# Altium PCB FEE_PCB.PcbDoc (part 1 of 2)
Units mm, origin at the board's own origin, x right, y up, seen from the top; angles counter-clockwise.
Board outline 152.4 x 101.6 mm, 2 copper layers (Top Layer, Bottom Layer); 166 components, 108 nets, 486 pads, 10 vias.
Unrouted connection lines stored in the file: 130.
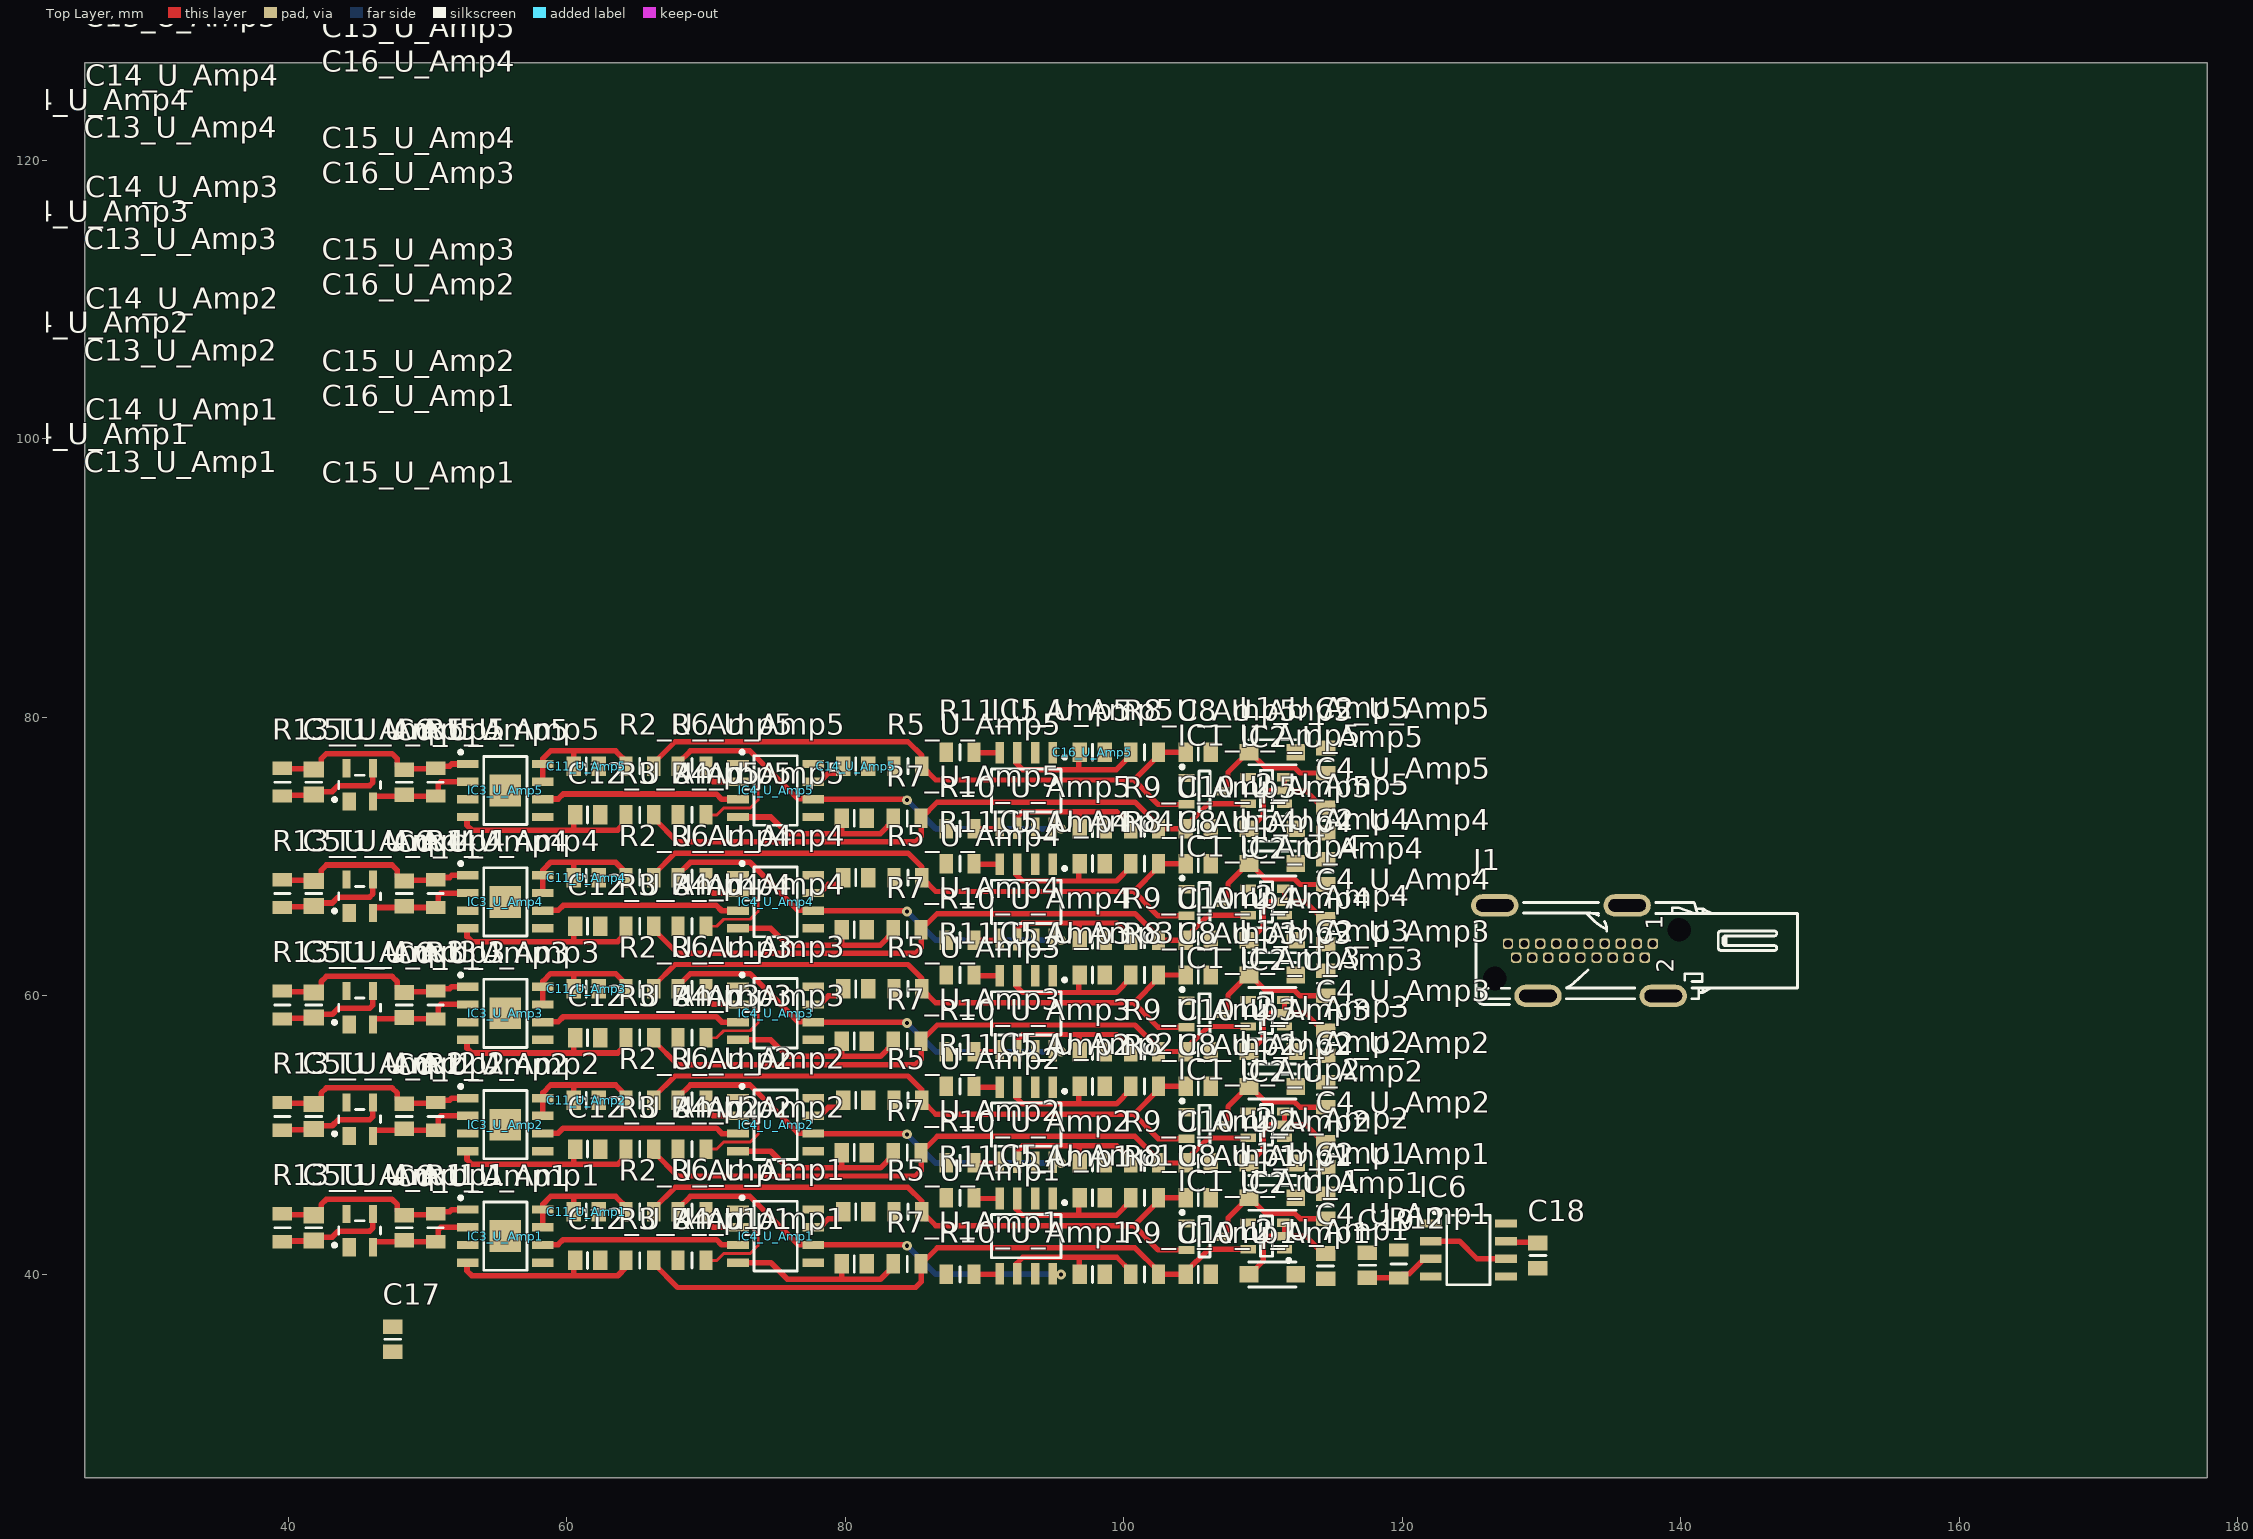
[diagram p0: Top Layer view]
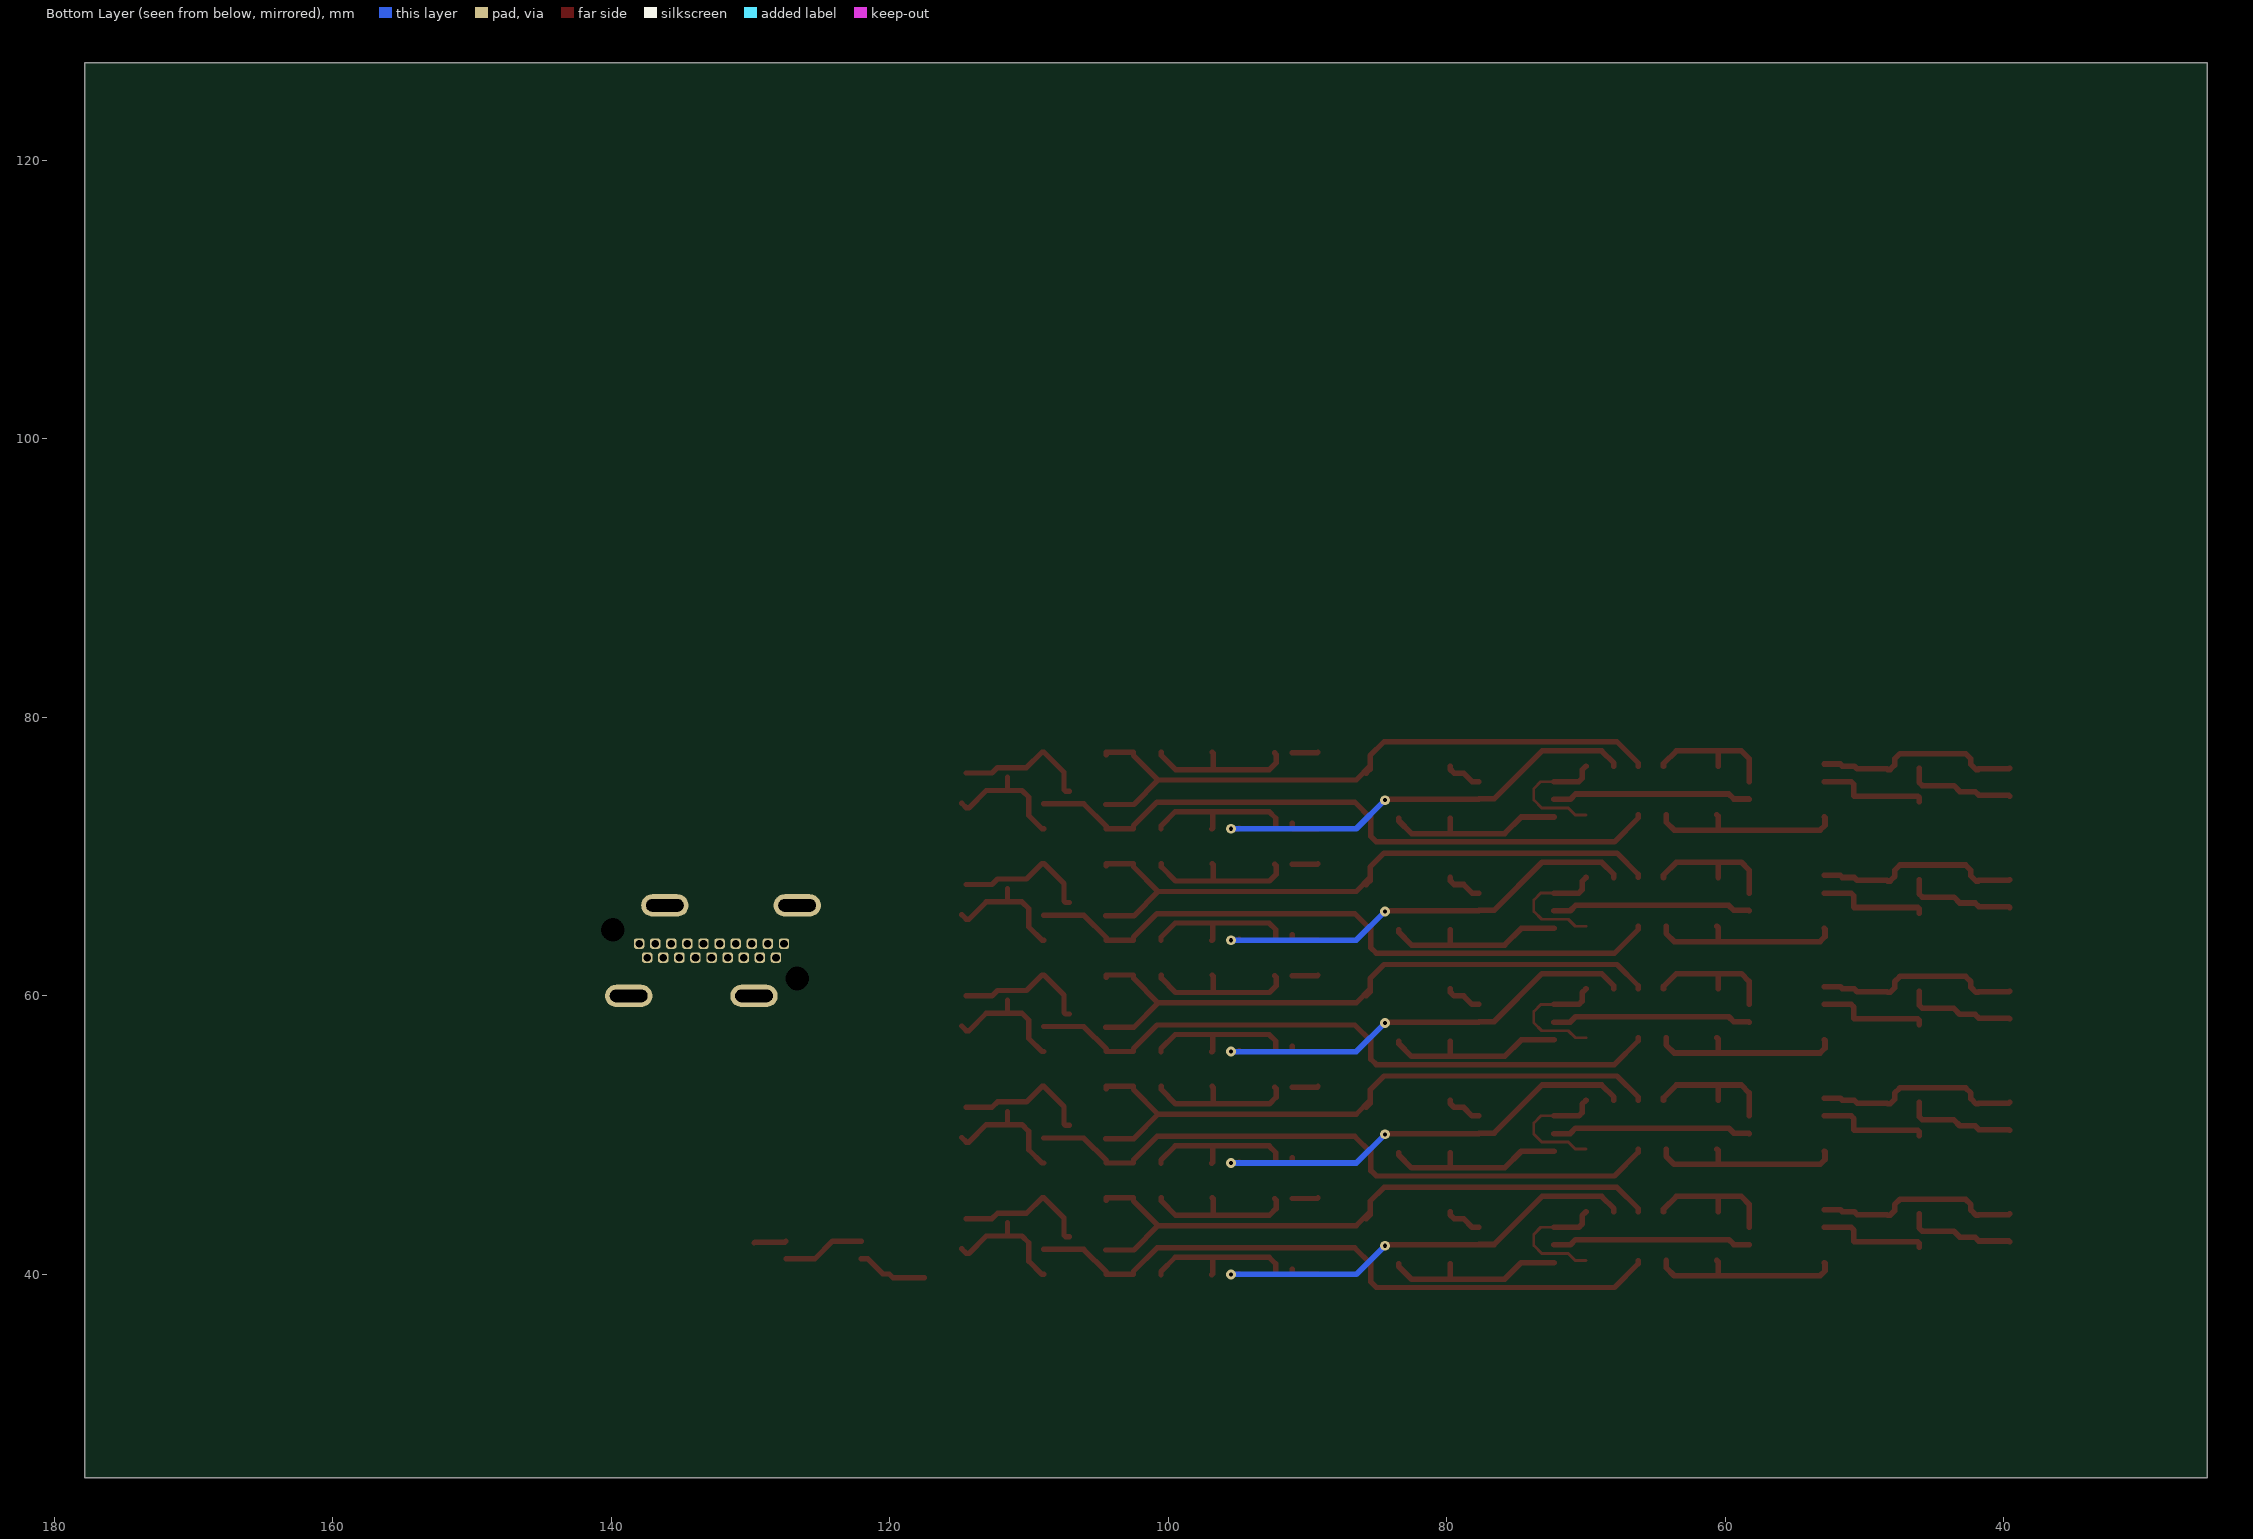
[diagram p1: Bottom Layer view, seen from below]
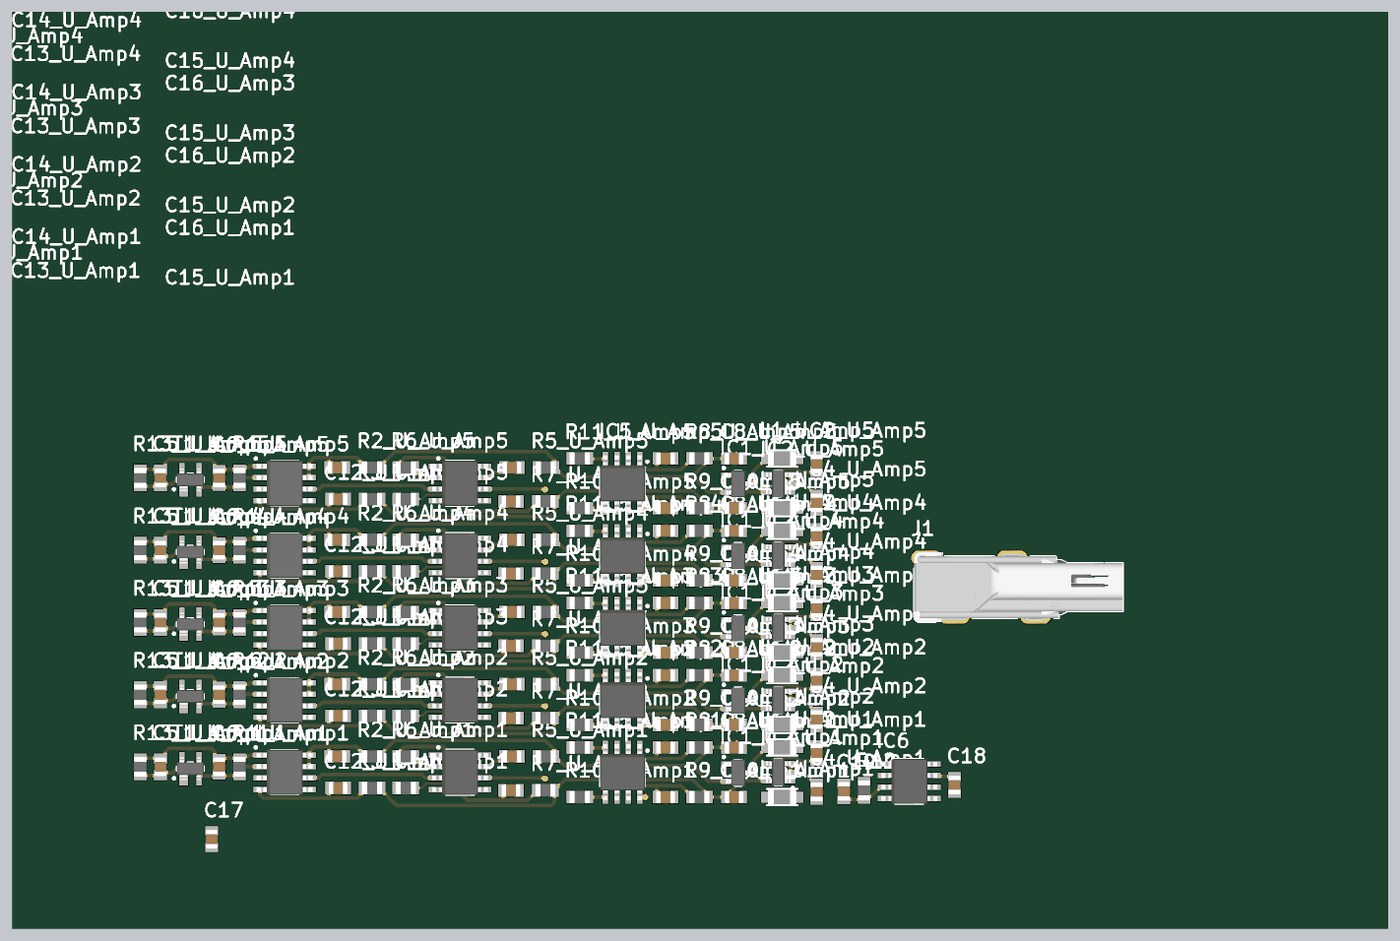
[diagram p3: 3D render of the assembled board from above, using the file's embedded part models]

## Layer stack, top to bottom
Top Solder: solder mask 0.0102, Solder Resist, Dk 3.5
Top Layer: signal copper 0.0356
Dielectric 1: dielectric 0.32, FR-4, Dk 4.8
Bottom Layer: signal copper 0.0356
Bottom Solder: solder mask 0.0102, Solder Resist, Dk 3.5

## Board outline
25.4,25.4 177.8,25.4 177.8,127 25.4,127

## Design rules (kind name [scope] priority, off if disabled: settings)
Clearance [All] p1: gap=0.2 ignorepadtopadclearanceinfootprint=FALSE
DiffPairsRouting [All] p1: maxlimit=0.254 minlimit=0.254 mostfreqgap=0.254 toplayer_minwidth=0.381 toplayer_maxwidth=0.381 toplayer_prefwidth=0.381 bottomlayer_minwidth=0.381 bottomlayer_maxwidth=0.381 bottomlayer_prefwidth=0.381 maxuncoupledlength=12.7
PolygonConnect [All] p1: connectstyle=Relief reliefconductorwidth=0.254 reliefentries=4 polygonreliefangle="90 Angle" airgapwidth=0.254
RoomDefinition Bank [InComponentClass('Bank')] p1: confinementstyle=ConfineIn formatcopy=TRUE lockcomponents=FALSE outline 116,38.75 162.5,38.75 162.5,78.75 116,78.75
RoomDefinition U_Amp5 [InComponentClass('U_Amp5')] p2: confinementstyle=ConfineIn formatcopy=TRUE lockcomponents=FALSE outline 38.25,70.75 116,70.75 116,78.75 38.25,78.75
RoomDefinition U_Amp4 [InComponentClass('U_Amp4')] p3: confinementstyle=ConfineIn formatcopy=TRUE lockcomponents=FALSE outline 38.25,62.75 116,62.75 116,70.75 38.25,70.75
RoomDefinition U_Amp3 [InComponentClass('U_Amp3')] p4: confinementstyle=ConfineIn formatcopy=TRUE lockcomponents=FALSE outline 38.25,54.75 116,54.75 116,62.75 38.25,62.75
RoomDefinition U_Amp2 [InComponentClass('U_Amp2')] p5: confinementstyle=ConfineIn formatcopy=TRUE lockcomponents=FALSE outline 38.25,46.75 116,46.75 116,54.75 38.25,54.75
RoomDefinition U_Amp1 [InComponentClass('U_Amp1')] p6: confinementstyle=ConfineIn formatcopy=TRUE lockcomponents=FALSE outline 38.25,38.75 116,38.75 116,46.75 38.25,46.75
RoutingVias [All] p1: holewidth=0.3 width=0.7 viastyle="Through Hole" minholewidth=0.3 minwidth=0.7 maxholewidth=0.3 maxwidth=0.7
SolderMaskExpansion [All] p1: expansion=0.102 istentingtop=FALSE
Width [All] p1: maxlimit=0.4 minlimit=0.15 preferedwidth=0.2
29 further rules are at their usual default settings.

## Classes and differential pairs
channel class Bank: U_Bank1 U_Bank2 U_Bank3 U_Bank4 U_Bank5 U_Bank6 U_Bank7 U_Bank8 U_Bank9 U_Bank10 U_Bank11 U_Bank12 U_Bank13 U_Bank14 U_Bank15 U_Bank16 U_Bank17 U_Bank18 U_Bank19 U_Bank20
channel class Amp: U_Amp1 U_Amp2 U_Amp3 U_Amp4 U_Amp5
component class U_Amp5: C2_U_Amp5 C4_U_Amp5 C5_U_Amp5 C6_U_Amp5 C8_U_Amp5 C10_U_Amp5 C11_U_Amp5 C12_U_Amp5 C13_U_Amp5 C14_U_Amp5 C15_U_Amp5 C16_U_Amp5 IC1_U_Amp5 IC2_U_Amp5 IC3_U_Amp5 IC4_U_Amp5 IC5_U_Amp5 L1_U_Amp5 L2_U_Amp5 R1_U_Amp5 R2_U_Amp5 R3_U_Amp5 R4_U_Amp5 R5_U_Amp5 R6_U_Amp5 R7_U_Amp5 R8_U_Amp5 R9_U_Amp5 R10_U_Amp5 R11_U_Amp5 R13_U_Amp5 T1_U_Amp5
component class U_Amp4: C2_U_Amp4 C4_U_Amp4 C5_U_Amp4 C6_U_Amp4 C8_U_Amp4 C10_U_Amp4 C11_U_Amp4 C12_U_Amp4 C13_U_Amp4 C14_U_Amp4 C15_U_Amp4 C16_U_Amp4 IC1_U_Amp4 IC2_U_Amp4 IC3_U_Amp4 IC4_U_Amp4 IC5_U_Amp4 L1_U_Amp4 L2_U_Amp4 R1_U_Amp4 R2_U_Amp4 R3_U_Amp4 R4_U_Amp4 R5_U_Amp4 R6_U_Amp4 R7_U_Amp4 R8_U_Amp4 R9_U_Amp4 R10_U_Amp4 R11_U_Amp4 R13_U_Amp4 T1_U_Amp4
component class U_Amp3: C2_U_Amp3 C4_U_Amp3 C5_U_Amp3 C6_U_Amp3 C8_U_Amp3 C10_U_Amp3 C11_U_Amp3 C12_U_Amp3 C13_U_Amp3 C14_U_Amp3 C15_U_Amp3 C16_U_Amp3 IC1_U_Amp3 IC2_U_Amp3 IC3_U_Amp3 IC4_U_Amp3 IC5_U_Amp3 L1_U_Amp3 L2_U_Amp3 R1_U_Amp3 R2_U_Amp3 R3_U_Amp3 R4_U_Amp3 R5_U_Amp3 R6_U_Amp3 R7_U_Amp3 R8_U_Amp3 R9_U_Amp3 R10_U_Amp3 R11_U_Amp3 R13_U_Amp3 T1_U_Amp3
component class U_Amp2: C2_U_Amp2 C4_U_Amp2 C5_U_Amp2 C6_U_Amp2 C8_U_Amp2 C10_U_Amp2 C11_U_Amp2 C12_U_Amp2 C13_U_Amp2 C14_U_Amp2 C15_U_Amp2 C16_U_Amp2 IC1_U_Amp2 IC2_U_Amp2 IC3_U_Amp2 IC4_U_Amp2 IC5_U_Amp2 L1_U_Amp2 L2_U_Amp2 R1_U_Amp2 R2_U_Amp2 R3_U_Amp2 R4_U_Amp2 R5_U_Amp2 R6_U_Amp2 R7_U_Amp2 R8_U_Amp2 R9_U_Amp2 R10_U_Amp2 R11_U_Amp2 R13_U_Amp2 T1_U_Amp2
component class U_Amp1: C2_U_Amp1 C4_U_Amp1 C5_U_Amp1 C6_U_Amp1 C8_U_Amp1 C10_U_Amp1 C11_U_Amp1 C12_U_Amp1 C13_U_Amp1 C14_U_Amp1 C15_U_Amp1 C16_U_Amp1 IC1_U_Amp1 IC2_U_Amp1 IC3_U_Amp1 IC4_U_Amp1 IC5_U_Amp1 L1_U_Amp1 L2_U_Amp1 R1_U_Amp1 R2_U_Amp1 R3_U_Amp1 R4_U_Amp1 R5_U_Amp1 R6_U_Amp1 R7_U_Amp1 R8_U_Amp1 R9_U_Amp1 R10_U_Amp1 R11_U_Amp1 R13_U_Amp1 T1_U_Amp1
differential pair OUT_U_Amp100: +OUT_U_Amp100_P -OUT_U_Amp100_N
differential pair OUT_U_Amp99: +OUT_U_Amp99_P -OUT_U_Amp99_N
differential pair OUT_U_Amp98: +OUT_U_Amp98_P -OUT_U_Amp98_N
differential pair OUT_U_Amp97: +OUT_U_Amp97_P -OUT_U_Amp97_N
differential pair OUT_U_Amp96: +OUT_U_Amp96_P -OUT_U_Amp96_N
differential pair OUT_U_Amp95: +OUT_U_Amp95_P -OUT_U_Amp95_N
differential pair OUT_U_Amp94: +OUT_U_Amp94_P -OUT_U_Amp94_N
differential pair OUT_U_Amp93: +OUT_U_Amp93_P -OUT_U_Amp93_N
differential pair OUT_U_Amp92: +OUT_U_Amp92_P -OUT_U_Amp92_N
differential pair OUT_U_Amp91: +OUT_U_Amp91_P -OUT_U_Amp91_N
differential pair OUT_U_Amp90: +OUT_U_Amp90_P -OUT_U_Amp90_N
differential pair OUT_U_Amp89: +OUT_U_Amp89_P -OUT_U_Amp89_N
differential pair OUT_U_Amp88: +OUT_U_Amp88_P -OUT_U_Amp88_N
differential pair OUT_U_Amp87: +OUT_U_Amp87_P -OUT_U_Amp87_N
differential pair OUT_U_Amp86: +OUT_U_Amp86_P -OUT_U_Amp86_N
differential pair OUT_U_Amp85: +OUT_U_Amp85_P -OUT_U_Amp85_N
differential pair OUT_U_Amp84: +OUT_U_Amp84_P -OUT_U_Amp84_N
differential pair OUT_U_Amp83: +OUT_U_Amp83_P -OUT_U_Amp83_N
differential pair OUT_U_Amp82: +OUT_U_Amp82_P -OUT_U_Amp82_N
differential pair OUT_U_Amp81: +OUT_U_Amp81_P -OUT_U_Amp81_N
differential pair OUT_U_Amp80: +OUT_U_Amp80_P -OUT_U_Amp80_N
differential pair OUT_U_Amp79: +OUT_U_Amp79_P -OUT_U_Amp79_N
differential pair OUT_U_Amp78: +OUT_U_Amp78_P -OUT_U_Amp78_N
differential pair OUT_U_Amp77: +OUT_U_Amp77_P -OUT_U_Amp77_N
differential pair OUT_U_Amp76: +OUT_U_Amp76_P -OUT_U_Amp76_N
differential pair OUT_U_Amp75: +OUT_U_Amp75_P -OUT_U_Amp75_N
differential pair OUT_U_Amp74: +OUT_U_Amp74_P -OUT_U_Amp74_N
differential pair OUT_U_Amp73: +OUT_U_Amp73_P -OUT_U_Amp73_N
differential pair OUT_U_Amp72: +OUT_U_Amp72_P -OUT_U_Amp72_N
differential pair OUT_U_Amp71: +OUT_U_Amp71_P -OUT_U_Amp71_N
differential pair OUT_U_Amp70: +OUT_U_Amp70_P -OUT_U_Amp70_N
differential pair OUT_U_Amp69: +OUT_U_Amp69_P -OUT_U_Amp69_N
differential pair OUT_U_Amp68: +OUT_U_Amp68_P -OUT_U_Amp68_N
differential pair OUT_U_Amp67: +OUT_U_Amp67_P -OUT_U_Amp67_N
differential pair OUT_U_Amp66: +OUT_U_Amp66_P -OUT_U_Amp66_N
differential pair OUT_U_Amp65: +OUT_U_Amp65_P -OUT_U_Amp65_N
differential pair OUT_U_Amp64: +OUT_U_Amp64_P -OUT_U_Amp64_N
differential pair OUT_U_Amp63: +OUT_U_Amp63_P -OUT_U_Amp63_N
differential pair OUT_U_Amp62: +OUT_U_Amp62_P -OUT_U_Amp62_N
differential pair OUT_U_Amp61: +OUT_U_Amp61_P -OUT_U_Amp61_N
differential pair OUT_U_Amp60: +OUT_U_Amp60_P -OUT_U_Amp60_N
differential pair OUT_U_Amp59: +OUT_U_Amp59_P -OUT_U_Amp59_N
differential pair OUT_U_Amp58: +OUT_U_Amp58_P -OUT_U_Amp58_N
differential pair OUT_U_Amp57: +OUT_U_Amp57_P -OUT_U_Amp57_N
differential pair OUT_U_Amp56: +OUT_U_Amp56_P -OUT_U_Amp56_N
differential pair OUT_U_Amp55: +OUT_U_Amp55_P -OUT_U_Amp55_N
differential pair OUT_U_Amp54: +OUT_U_Amp54_P -OUT_U_Amp54_N
differential pair OUT_U_Amp53: +OUT_U_Amp53_P -OUT_U_Amp53_N
differential pair OUT_U_Amp52: +OUT_U_Amp52_P -OUT_U_Amp52_N
differential pair OUT_U_Amp51: +OUT_U_Amp51_P -OUT_U_Amp51_N
differential pair OUT_U_Amp50: +OUT_U_Amp50_P -OUT_U_Amp50_N
differential pair OUT_U_Amp49: +OUT_U_Amp49_P -OUT_U_Amp49_N
differential pair OUT_U_Amp48: +OUT_U_Amp48_P -OUT_U_Amp48_N
differential pair OUT_U_Amp47: +OUT_U_Amp47_P -OUT_U_Amp47_N
differential pair OUT_U_Amp46: +OUT_U_Amp46_P -OUT_U_Amp46_N
differential pair OUT_U_Amp45: +OUT_U_Amp45_P -OUT_U_Amp45_N
differential pair OUT_U_Amp44: +OUT_U_Amp44_P -OUT_U_Amp44_N
differential pair OUT_U_Amp43: +OUT_U_Amp43_P -OUT_U_Amp43_N
differential pair OUT_U_Amp42: +OUT_U_Amp42_P -OUT_U_Amp42_N
differential pair OUT_U_Amp41: +OUT_U_Amp41_P -OUT_U_Amp41_N
differential pair OUT_U_Amp40: +OUT_U_Amp40_P -OUT_U_Amp40_N
differential pair OUT_U_Amp39: +OUT_U_Amp39_P -OUT_U_Amp39_N
differential pair OUT_U_Amp38: +OUT_U_Amp38_P -OUT_U_Amp38_N
differential pair OUT_U_Amp37: +OUT_U_Amp37_P -OUT_U_Amp37_N
differential pair OUT_U_Amp36: +OUT_U_Amp36_P -OUT_U_Amp36_N
differential pair OUT_U_Amp35: +OUT_U_Amp35_P -OUT_U_Amp35_N
differential pair OUT_U_Amp34: +OUT_U_Amp34_P -OUT_U_Amp34_N
differential pair OUT_U_Amp33: +OUT_U_Amp33_P -OUT_U_Amp33_N
differential pair OUT_U_Amp32: +OUT_U_Amp32_P -OUT_U_Amp32_N
differential pair OUT_U_Amp31: +OUT_U_Amp31_P -OUT_U_Amp31_N
differential pair OUT_U_Amp30: +OUT_U_Amp30_P -OUT_U_Amp30_N
differential pair OUT_U_Amp29: +OUT_U_Amp29_P -OUT_U_Amp29_N
differential pair OUT_U_Amp28: +OUT_U_Amp28_P -OUT_U_Amp28_N
differential pair OUT_U_Amp27: +OUT_U_Amp27_P -OUT_U_Amp27_N
differential pair OUT_U_Amp26: +OUT_U_Amp26_P -OUT_U_Amp26_N
differential pair OUT_U_Amp25: +OUT_U_Amp25_P -OUT_U_Amp25_N
differential pair OUT_U_Amp24: +OUT_U_Amp24_P -OUT_U_Amp24_N
differential pair OUT_U_Amp23: +OUT_U_Amp23_P -OUT_U_Amp23_N
differential pair OUT_U_Amp22: +OUT_U_Amp22_P -OUT_U_Amp22_N
differential pair OUT_U_Amp21: +OUT_U_Amp21_P -OUT_U_Amp21_N
differential pair OUT_U_Amp20: +OUT_U_Amp20_P -OUT_U_Amp20_N
differential pair OUT_U_Amp19: +OUT_U_Amp19_P -OUT_U_Amp19_N
differential pair OUT_U_Amp18: +OUT_U_Amp18_P -OUT_U_Amp18_N
differential pair OUT_U_Amp17: +OUT_U_Amp17_P -OUT_U_Amp17_N
differential pair OUT_U_Amp16: +OUT_U_Amp16_P -OUT_U_Amp16_N
differential pair OUT_U_Amp15: +OUT_U_Amp15_P -OUT_U_Amp15_N
differential pair OUT_U_Amp14: +OUT_U_Amp14_P -OUT_U_Amp14_N
differential pair OUT_U_Amp13: +OUT_U_Amp13_P -OUT_U_Amp13_N
differential pair OUT_U_Amp12: +OUT_U_Amp12_P -OUT_U_Amp12_N
differential pair OUT_U_Amp11: +OUT_U_Amp11_P -OUT_U_Amp11_N
differential pair OUT_U_Amp10: +OUT_U_Amp10_P -OUT_U_Amp10_N
differential pair OUT_U_Amp9: +OUT_U_Amp9_P -OUT_U_Amp9_N
differential pair OUT_U_Amp8: +OUT_U_Amp8_P -OUT_U_Amp8_N
differential pair OUT_U_Amp7: +OUT_U_Amp7_P -OUT_U_Amp7_N
differential pair OUT_U_Amp6: +OUT_U_Amp6_P -OUT_U_Amp6_N
differential pair OUT_HIZ_U_Amp100: +OUT_HIZ_U_Amp100_P -OUT_HIZ_U_Amp100_N
differential pair OUT_HIZ_U_Amp99: +OUT_HIZ_U_Amp99_P -OUT_HIZ_U_Amp99_N
differential pair OUT_HIZ_U_Amp98: +OUT_HIZ_U_Amp98_P -OUT_HIZ_U_Amp98_N
differential pair OUT_HIZ_U_Amp97: +OUT_HIZ_U_Amp97_P -OUT_HIZ_U_Amp97_N
differential pair OUT_HIZ_U_Amp96: +OUT_HIZ_U_Amp96_P -OUT_HIZ_U_Amp96_N
differential pair OUT_HIZ_U_Amp95: +OUT_HIZ_U_Amp95_P -OUT_HIZ_U_Amp95_N
differential pair OUT_HIZ_U_Amp94: +OUT_HIZ_U_Amp94_P -OUT_HIZ_U_Amp94_N
differential pair OUT_HIZ_U_Amp93: +OUT_HIZ_U_Amp93_P -OUT_HIZ_U_Amp93_N
differential pair OUT_HIZ_U_Amp92: +OUT_HIZ_U_Amp92_P -OUT_HIZ_U_Amp92_N
differential pair OUT_HIZ_U_Amp91: +OUT_HIZ_U_Amp91_P -OUT_HIZ_U_Amp91_N
differential pair OUT_HIZ_U_Amp90: +OUT_HIZ_U_Amp90_P -OUT_HIZ_U_Amp90_N
differential pair OUT_HIZ_U_Amp89: +OUT_HIZ_U_Amp89_P -OUT_HIZ_U_Amp89_N
differential pair OUT_HIZ_U_Amp88: +OUT_HIZ_U_Amp88_P -OUT_HIZ_U_Amp88_N
differential pair OUT_HIZ_U_Amp87: +OUT_HIZ_U_Amp87_P -OUT_HIZ_U_Amp87_N
differential pair OUT_HIZ_U_Amp86: +OUT_HIZ_U_Amp86_P -OUT_HIZ_U_Amp86_N
differential pair OUT_HIZ_U_Amp85: +OUT_HIZ_U_Amp85_P -OUT_HIZ_U_Amp85_N
differential pair OUT_HIZ_U_Amp84: +OUT_HIZ_U_Amp84_P -OUT_HIZ_U_Amp84_N
differential pair OUT_HIZ_U_Amp83: +OUT_HIZ_U_Amp83_P -OUT_HIZ_U_Amp83_N
differential pair OUT_HIZ_U_Amp82: +OUT_HIZ_U_Amp82_P -OUT_HIZ_U_Amp82_N
differential pair OUT_HIZ_U_Amp81: +OUT_HIZ_U_Amp81_P -OUT_HIZ_U_Amp81_N
differential pair OUT_HIZ_U_Amp80: +OUT_HIZ_U_Amp80_P -OUT_HIZ_U_Amp80_N
differential pair OUT_HIZ_U_Amp79: +OUT_HIZ_U_Amp79_P -OUT_HIZ_U_Amp79_N
differential pair OUT_HIZ_U_Amp78: +OUT_HIZ_U_Amp78_P -OUT_HIZ_U_Amp78_N
differential pair OUT_HIZ_U_Amp77: +OUT_HIZ_U_Amp77_P -OUT_HIZ_U_Amp77_N
differential pair OUT_HIZ_U_Amp76: +OUT_HIZ_U_Amp76_P -OUT_HIZ_U_Amp76_N
differential pair OUT_HIZ_U_Amp75: +OUT_HIZ_U_Amp75_P -OUT_HIZ_U_Amp75_N
differential pair OUT_HIZ_U_Amp74: +OUT_HIZ_U_Amp74_P -OUT_HIZ_U_Amp74_N
differential pair OUT_HIZ_U_Amp73: +OUT_HIZ_U_Amp73_P -OUT_HIZ_U_Amp73_N
differential pair OUT_HIZ_U_Amp72: +OUT_HIZ_U_Amp72_P -OUT_HIZ_U_Amp72_N
differential pair OUT_HIZ_U_Amp71: +OUT_HIZ_U_Amp71_P -OUT_HIZ_U_Amp71_N
differential pair OUT_HIZ_U_Amp70: +OUT_HIZ_U_Amp70_P -OUT_HIZ_U_Amp70_N
differential pair OUT_HIZ_U_Amp69: +OUT_HIZ_U_Amp69_P -OUT_HIZ_U_Amp69_N
differential pair OUT_HIZ_U_Amp68: +OUT_HIZ_U_Amp68_P -OUT_HIZ_U_Amp68_N
differential pair OUT_HIZ_U_Amp67: +OUT_HIZ_U_Amp67_P -OUT_HIZ_U_Amp67_N
differential pair OUT_HIZ_U_Amp66: +OUT_HIZ_U_Amp66_P -OUT_HIZ_U_Amp66_N
differential pair OUT_HIZ_U_Amp65: +OUT_HIZ_U_Amp65_P -OUT_HIZ_U_Amp65_N
differential pair OUT_HIZ_U_Amp64: +OUT_HIZ_U_Amp64_P -OUT_HIZ_U_Amp64_N
differential pair OUT_HIZ_U_Amp63: +OUT_HIZ_U_Amp63_P -OUT_HIZ_U_Amp63_N
differential pair OUT_HIZ_U_Amp62: +OUT_HIZ_U_Amp62_P -OUT_HIZ_U_Amp62_N
differential pair OUT_HIZ_U_Amp61: +OUT_HIZ_U_Amp61_P -OUT_HIZ_U_Amp61_N
differential pair OUT_HIZ_U_Amp60: +OUT_HIZ_U_Amp60_P -OUT_HIZ_U_Amp60_N
differential pair OUT_HIZ_U_Amp59: +OUT_HIZ_U_Amp59_P -OUT_HIZ_U_Amp59_N
differential pair OUT_HIZ_U_Amp58: +OUT_HIZ_U_Amp58_P -OUT_HIZ_U_Amp58_N
differential pair OUT_HIZ_U_Amp57: +OUT_HIZ_U_Amp57_P -OUT_HIZ_U_Amp57_N
differential pair OUT_HIZ_U_Amp56: +OUT_HIZ_U_Amp56_P -OUT_HIZ_U_Amp56_N
differential pair OUT_HIZ_U_Amp55: +OUT_HIZ_U_Amp55_P -OUT_HIZ_U_Amp55_N
differential pair OUT_HIZ_U_Amp54: +OUT_HIZ_U_Amp54_P -OUT_HIZ_U_Amp54_N
differential pair OUT_HIZ_U_Amp53: +OUT_HIZ_U_Amp53_P -OUT_HIZ_U_Amp53_N
differential pair OUT_HIZ_U_Amp52: +OUT_HIZ_U_Amp52_P -OUT_HIZ_U_Amp52_N
differential pair OUT_HIZ_U_Amp51: +OUT_HIZ_U_Amp51_P -OUT_HIZ_U_Amp51_N
differential pair OUT_HIZ_U_Amp50: +OUT_HIZ_U_Amp50_P -OUT_HIZ_U_Amp50_N
differential pair OUT_HIZ_U_Amp49: +OUT_HIZ_U_Amp49_P -OUT_HIZ_U_Amp49_N
differential pair OUT_HIZ_U_Amp48: +OUT_HIZ_U_Amp48_P -OUT_HIZ_U_Amp48_N
differential pair OUT_HIZ_U_Amp47: +OUT_HIZ_U_Amp47_P -OUT_HIZ_U_Amp47_N
differential pair OUT_HIZ_U_Amp46: +OUT_HIZ_U_Amp46_P -OUT_HIZ_U_Amp46_N
differential pair OUT_HIZ_U_Amp45: +OUT_HIZ_U_Amp45_P -OUT_HIZ_U_Amp45_N
differential pair OUT_HIZ_U_Amp44: +OUT_HIZ_U_Amp44_P -OUT_HIZ_U_Amp44_N
differential pair OUT_HIZ_U_Amp43: +OUT_HIZ_U_Amp43_P -OUT_HIZ_U_Amp43_N
differential pair OUT_HIZ_U_Amp42: +OUT_HIZ_U_Amp42_P -OUT_HIZ_U_Amp42_N
differential pair OUT_HIZ_U_Amp41: +OUT_HIZ_U_Amp41_P -OUT_HIZ_U_Amp41_N
differential pair OUT_HIZ_U_Amp40: +OUT_HIZ_U_Amp40_P -OUT_HIZ_U_Amp40_N
differential pair OUT_HIZ_U_Amp39: +OUT_HIZ_U_Amp39_P -OUT_HIZ_U_Amp39_N
differential pair OUT_HIZ_U_Amp38: +OUT_HIZ_U_Amp38_P -OUT_HIZ_U_Amp38_N
differential pair OUT_HIZ_U_Amp37: +OUT_HIZ_U_Amp37_P -OUT_HIZ_U_Amp37_N
differential pair OUT_HIZ_U_Amp36: +OUT_HIZ_U_Amp36_P -OUT_HIZ_U_Amp36_N
differential pair OUT_HIZ_U_Amp35: +OUT_HIZ_U_Amp35_P -OUT_HIZ_U_Amp35_N
differential pair OUT_HIZ_U_Amp34: +OUT_HIZ_U_Amp34_P -OUT_HIZ_U_Amp34_N
differential pair OUT_HIZ_U_Amp33: +OUT_HIZ_U_Amp33_P -OUT_HIZ_U_Amp33_N
differential pair OUT_HIZ_U_Amp32: +OUT_HIZ_U_Amp32_P -OUT_HIZ_U_Amp32_N
differential pair OUT_HIZ_U_Amp31: +OUT_HIZ_U_Amp31_P -OUT_HIZ_U_Amp31_N
differential pair OUT_HIZ_U_Amp30: +OUT_HIZ_U_Amp30_P -OUT_HIZ_U_Amp30_N
differential pair OUT_HIZ_U_Amp29: +OUT_HIZ_U_Amp29_P -OUT_HIZ_U_Amp29_N
differential pair OUT_HIZ_U_Amp28: +OUT_HIZ_U_Amp28_P -OUT_HIZ_U_Amp28_N
differential pair OUT_HIZ_U_Amp27: +OUT_HIZ_U_Amp27_P -OUT_HIZ_U_Amp27_N
differential pair OUT_HIZ_U_Amp26: +OUT_HIZ_U_Amp26_P -OUT_HIZ_U_Amp26_N
differential pair OUT_HIZ_U_Amp25: +OUT_HIZ_U_Amp25_P -OUT_HIZ_U_Amp25_N
differential pair OUT_HIZ_U_Amp24: +OUT_HIZ_U_Amp24_P -OUT_HIZ_U_Amp24_N
differential pair OUT_HIZ_U_Amp23: +OUT_HIZ_U_Amp23_P -OUT_HIZ_U_Amp23_N
differential pair OUT_HIZ_U_Amp22: +OUT_HIZ_U_Amp22_P -OUT_HIZ_U_Amp22_N
differential pair OUT_HIZ_U_Amp21: +OUT_HIZ_U_Amp21_P -OUT_HIZ_U_Amp21_N
differential pair OUT_HIZ_U_Amp20: +OUT_HIZ_U_Amp20_P -OUT_HIZ_U_Amp20_N
differential pair OUT_HIZ_U_Amp19: +OUT_HIZ_U_Amp19_P -OUT_HIZ_U_Amp19_N
differential pair OUT_HIZ_U_Amp18: +OUT_HIZ_U_Amp18_P -OUT_HIZ_U_Amp18_N
differential pair OUT_HIZ_U_Amp17: +OUT_HIZ_U_Amp17_P -OUT_HIZ_U_Amp17_N
differential pair OUT_HIZ_U_Amp16: +OUT_HIZ_U_Amp16_P -OUT_HIZ_U_Amp16_N
differential pair OUT_HIZ_U_Amp15: +OUT_HIZ_U_Amp15_P -OUT_HIZ_U_Amp15_N
differential pair OUT_HIZ_U_Amp14: +OUT_HIZ_U_Amp14_P -OUT_HIZ_U_Amp14_N
differential pair OUT_HIZ_U_Amp13: +OUT_HIZ_U_Amp13_P -OUT_HIZ_U_Amp13_N
differential pair OUT_HIZ_U_Amp12: +OUT_HIZ_U_Amp12_P -OUT_HIZ_U_Amp12_N
differential pair OUT_HIZ_U_Amp11: +OUT_HIZ_U_Amp11_P -OUT_HIZ_U_Amp11_N
differential pair OUT_HIZ_U_Amp10: +OUT_HIZ_U_Amp10_P -OUT_HIZ_U_Amp10_N
differential pair OUT_HIZ_U_Amp9: +OUT_HIZ_U_Amp9_P -OUT_HIZ_U_Amp9_N
differential pair OUT_HIZ_U_Amp8: +OUT_HIZ_U_Amp8_P -OUT_HIZ_U_Amp8_N
differential pair OUT_HIZ_U_Amp7: +OUT_HIZ_U_Amp7_P -OUT_HIZ_U_Amp7_N
differential pair OUT_HIZ_U_Amp6: +OUT_HIZ_U_Amp6_P -OUT_HIZ_U_Amp6_N
differential pair OUT_U_Amp5: +OUT_U_Amp5_P -OUT_U_Amp5_N
differential pair OUT_U_Amp4: +OUT_U_Amp4_P -OUT_U_Amp4_N
differential pair OUT_U_Amp3: +OUT_U_Amp3_P -OUT_U_Amp3_N
differential pair OUT_U_Amp2: +OUT_U_Amp2_P -OUT_U_Amp2_N
differential pair OUT_U_Amp1: +OUT_U_Amp1_P -OUT_U_Amp1_N
differential pair OUT_HIZ_U_Amp5: +OUT_HIZ_U_Amp5_P -OUT_HIZ_U_Amp5_N
differential pair OUT_HIZ_U_Amp4: +OUT_HIZ_U_Amp4_P -OUT_HIZ_U_Amp4_N
differential pair OUT_HIZ_U_Amp3: +OUT_HIZ_U_Amp3_P -OUT_HIZ_U_Amp3_N
differential pair OUT_HIZ_U_Amp2: +OUT_HIZ_U_Amp2_P -OUT_HIZ_U_Amp2_N
differential pair OUT_HIZ_U_Amp1: +OUT_HIZ_U_Amp1_P -OUT_HIZ_U_Amp1_N

## Components (designator, comment, footprint, x,y, rotation, side; value= is the part's Value field where it differs from the comment)
C2_U_Amp1 "100nF" CAPC2012X135N 114.5,44.9 r90 top (schematic designator C2)
C2_U_Amp2 "100nF" CAPC2012X135N 114.5,52.9 r90 top (schematic designator C2)
C2_U_Amp3 "100nF" CAPC2012X135N 114.5,60.9 r90 top (schematic designator C2)
C2_U_Amp4 "100nF" CAPC2012X135N 114.5,68.9 r90 top (schematic designator C2)
C2_U_Amp5 "100nF" CAPC2012X135N 114.5,76.9 r90 top (schematic designator C2)
C4_U_Amp1 "100nF" CAPC2012X135N 114.5,40.6 r270 top (schematic designator C4)
C4_U_Amp2 "100nF" CAPC2012X135N 114.5,48.6 r270 top (schematic designator C4)
C4_U_Amp3 "100nF" CAPC2012X135N 114.5,56.6 r270 top (schematic designator C4)
C4_U_Amp4 "100nF" CAPC2012X135N 114.5,64.6 r270 top (schematic designator C4)
C4_U_Amp5 "100nF" CAPC2012X135N 114.5,72.6 r270 top (schematic designator C4)
C5_U_Amp1 "100pF" CAPC2012X88N 41.835,43.347 r270 top (schematic designator C5)
C5_U_Amp2 "100pF" CAPC2012X88N 41.835,51.347 r270 top (schematic designator C5)
C5_U_Amp3 "100pF" CAPC2012X88N 41.835,59.347 r270 top (schematic designator C5)
C5_U_Amp4 "100pF" CAPC2012X88N 41.835,67.347 r270 top (schematic designator C5)
C5_U_Amp5 "100pF" CAPC2012X88N 41.835,75.347 r270 top (schematic designator C5)
C6_U_Amp1 "10pF" CAPC2012X135N 48.335,43.347 r90 top (schematic designator C6)
C6_U_Amp2 "10pF" CAPC2012X135N 48.335,51.347 r90 top (schematic designator C6)
C6_U_Amp3 "10pF" CAPC2012X135N 48.335,59.347 r90 top (schematic designator C6)
C6_U_Amp4 "10pF" CAPC2012X135N 48.335,67.347 r90 top (schematic designator C6)
C6_U_Amp5 "10pF" CAPC2012X135N 48.335,75.347 r90 top (schematic designator C6)
C8_U_Amp1 "100nF" CAPC2012X135N 105.35,45.5 r0 top (schematic designator C8)
C8_U_Amp2 "100nF" CAPC2012X135N 105.35,53.5 r0 top (schematic designator C8)
C8_U_Amp3 "100nF" CAPC2012X135N 105.35,61.5 r0 top (schematic designator C8)
C8_U_Amp4 "100nF" CAPC2012X135N 105.35,69.5 r0 top (schematic designator C8)
C8_U_Amp5 "100nF" CAPC2012X135N 105.35,77.5 r0 top (schematic designator C8)
C10_U_Amp1 "100nF" CAPC2012X135N 105.35,40 r0 top (schematic designator C10)
C10_U_Amp2 "100nF" CAPC2012X135N 105.35,48 r0 top (schematic designator C10)
C10_U_Amp3 "100nF" CAPC2012X135N 105.35,56 r0 top (schematic designator C10)
C10_U_Amp4 "100nF" CAPC2012X135N 105.35,64 r0 top (schematic designator C10)
C10_U_Amp5 "100nF" CAPC2012X135N 105.35,72 r0 top (schematic designator C10)
C11_U_Amp1 "100nF" CAPC2012X135N 61.4,44.5 r0 top (schematic designator C11)
C11_U_Amp2 "100nF" CAPC2012X135N 61.4,52.5 r0 top (schematic designator C11)
C11_U_Amp3 "100nF" CAPC2012X135N 61.4,60.5 r0 top (schematic designator C11)
C11_U_Amp4 "100nF" CAPC2012X135N 61.4,68.5 r0 top (schematic designator C11)
C11_U_Amp5 "100nF" CAPC2012X135N 61.4,76.5 r0 top (schematic designator C11)
C12_U_Amp1 "100nF" CAPC2012X135N 61.5,41 r0 top (schematic designator C12)
C12_U_Amp2 "100nF" CAPC2012X135N 61.5,49 r0 top (schematic designator C12)
C12_U_Amp3 "100nF" CAPC2012X135N 61.5,57 r0 top (schematic designator C12)
C12_U_Amp4 "100nF" CAPC2012X135N 61.5,65 r0 top (schematic designator C12)
C12_U_Amp5 "100nF" CAPC2012X135N 61.5,73 r0 top (schematic designator C12)
C13_U_Amp1 "100nF" CAPC2012X135N 80.65,40.75 r0 top (schematic designator C13)
C13_U_Amp2 "100nF" CAPC2012X135N 80.65,48.75 r0 top (schematic designator C13)
C13_U_Amp3 "100nF" CAPC2012X135N 80.65,56.75 r0 top (schematic designator C13)
C13_U_Amp4 "100nF" CAPC2012X135N 80.65,64.75 r0 top (schematic designator C13)
C13_U_Amp5 "100nF" CAPC2012X135N 80.65,72.75 r0 top (schematic designator C13)
C14_U_Amp1 "100nF" CAPC2012X135N 80.75,44.5 r0 top (schematic designator C14)
C14_U_Amp2 "100nF" CAPC2012X135N 80.75,52.5 r0 top (schematic designator C14)
C14_U_Amp3 "100nF" CAPC2012X135N 80.75,60.5 r0 top (schematic designator C14)
C14_U_Amp4 "100nF" CAPC2012X135N 80.75,68.5 r0 top (schematic designator C14)
C14_U_Amp5 "100nF" CAPC2012X135N 80.75,76.5 r0 top (schematic designator C14)
C15_U_Amp1 "100nF" CAPC2012X135N 97.75,40 r0 top (schematic designator C15)
C15_U_Amp2 "100nF" CAPC2012X135N 97.75,48 r0 top (schematic designator C15)
C15_U_Amp3 "100nF" CAPC2012X135N 97.75,56 r0 top (schematic designator C15)
C15_U_Amp4 "100nF" CAPC2012X135N 97.75,64 r0 top (schematic designator C15)
C15_U_Amp5 "100nF" CAPC2012X135N 97.75,72 r0 top (schematic designator C15)
C16_U_Amp1 "100nF" CAPC2012X135N 97.75,45.5 r0 top (schematic designator C16)
C16_U_Amp2 "100nF" CAPC2012X135N 97.75,53.5 r0 top (schematic designator C16)
C16_U_Amp3 "100nF" CAPC2012X135N 97.75,61.5 r0 top (schematic designator C16)
C16_U_Amp4 "100nF" CAPC2012X135N 97.75,69.5 r0 top (schematic designator C16)
C16_U_Amp5 "100nF" CAPC2012X135N 97.75,77.5 r0 top (schematic designator C16)
C17 "100nF" CAPC2012X135N 47.5,35.35 r90 top
C18 "100nF" CAPC2012X135N 129.75,41.35 r270 top
C19 "100nF" CAPC2012X135N 117.5,40.65 r270 top
IC1_U_Amp1 "MCP1702T-5002E/CB" SOT95P255X145-3N 105.8,42.7 r0 top (schematic designator IC1)
IC1_U_Amp2 "MCP1702T-5002E/CB" SOT95P255X145-3N 105.8,50.7 r0 top (schematic designator IC1)
IC1_U_Amp3 "MCP1702T-5002E/CB" SOT95P255X145-3N 105.8,58.7 r0 top (schematic designator IC1)
IC1_U_Amp4 "MCP1702T-5002E/CB" SOT95P255X145-3N 105.8,66.7 r0 top (schematic designator IC1)
IC1_U_Amp5 "MCP1702T-5002E/CB" SOT95P255X145-3N 105.8,74.7 r0 top (schematic designator IC1)
IC2_U_Amp1 "MAX1735EUK50+T" SOT95P280X145-5N 110.25,42.75 r180 top (schematic designator IC2)
IC2_U_Amp2 "MAX1735EUK50+T" SOT95P280X145-5N 110.25,50.75 r180 top (schematic designator IC2)
IC2_U_Amp3 "MAX1735EUK50+T" SOT95P280X145-5N 110.25,58.75 r180 top (schematic designator IC2)
IC2_U_Amp4 "MAX1735EUK50+T" SOT95P280X145-5N 110.25,66.75 r180 top (schematic designator IC2)
IC2_U_Amp5 "MAX1735EUK50+T" SOT95P280X145-5N 110.25,74.75 r180 top (schematic designator IC2)
IC3_U_Amp1 "ADA4817-1 AD" SOIC127P600X175-9N-S229 55.588,42.75 r0 top (schematic designator IC3)
IC3_U_Amp2 "ADA4817-1 AD" SOIC127P600X175-9N-S229 55.588,50.75 r0 top (schematic designator IC3)
IC3_U_Amp3 "ADA4817-1 AD" SOIC127P600X175-9N-S229 55.588,58.75 r0 top (schematic designator IC3)
IC3_U_Amp4 "ADA4817-1 AD" SOIC127P600X175-9N-S229 55.588,66.75 r0 top (schematic designator IC3)
IC3_U_Amp5 "ADA4817-1 AD" SOIC127P600X175-9N-S229 55.588,74.75 r0 top (schematic designator IC3)
IC4_U_Amp1 "AD8055ANZ ANALOG DEVICES" SOIC127P600X175-8N 75,42.75 r0 top (schematic designator IC4)
IC4_U_Amp2 "AD8055ANZ ANALOG DEVICES" SOIC127P600X175-8N 75,50.75 r0 top (schematic designator IC4)
IC4_U_Amp3 "AD8055ANZ ANALOG DEVICES" SOIC127P600X175-8N 75,58.75 r0 top (schematic designator IC4)
IC4_U_Amp4 "AD8055ANZ ANALOG DEVICES" SOIC127P600X175-8N 75,66.75 r0 top (schematic designator IC4)
IC4_U_Amp5 "AD8055ANZ ANALOG DEVICES" SOIC127P600X175-8N 75,74.75 r0 top (schematic designator IC4)
IC5_U_Amp1 "AD8131AR" SOIC127P600X175-8N 93,42.75 r270 top (schematic designator IC5)
IC5_U_Amp2 "AD8131AR" SOIC127P600X175-8N 93,50.75 r270 top (schematic designator IC5)
IC5_U_Amp3 "AD8131AR" SOIC127P600X175-8N 93,58.75 r270 top (schematic designator IC5)
IC5_U_Amp4 "AD8131AR" SOIC127P600X175-8N 93,66.75 r270 top (schematic designator IC5)
IC5_U_Amp5 "AD8131AR" SOIC127P600X175-8N 93,74.75 r270 top (schematic designator IC5)
IC6 "AD8531ARZ" SOIC127P600X175-8N 124.75,41.75 r0 top
J1 "HDMI" TYCO_2007435-1 132.798,63.25 r90 top
L1_U_Amp1 "50R@100MHz" IND_MURATA_BLM31PG 110.675,45.5 r180 top (schematic designator L1)
L1_U_Amp2 "50R@100MHz" IND_MURATA_BLM31PG 110.675,53.5 r180 top (schematic designator L1)
L1_U_Amp3 "50R@100MHz" IND_MURATA_BLM31PG 110.675,61.5 r180 top (schematic designator L1)
L1_U_Amp4 "50R@100MHz" IND_MURATA_BLM31PG 110.675,69.5 r180 top (schematic designator L1)
L1_U_Amp5 "50R@100MHz" IND_MURATA_BLM31PG 110.675,77.5 r180 top (schematic designator L1)
L2_U_Amp1 "50R@100MHz" IND_MURATA_BLM31PG 110.675,40 r180 top (schematic designator L2)
L2_U_Amp2 "50R@100MHz" IND_MURATA_BLM31PG 110.675,48 r180 top (schematic designator L2)
L2_U_Amp3 "50R@100MHz" IND_MURATA_BLM31PG 110.675,56 r180 top (schematic designator L2)
L2_U_Amp4 "50R@100MHz" IND_MURATA_BLM31PG 110.675,64 r180 top (schematic designator L2)
L2_U_Amp5 "50R@100MHz" IND_MURATA_BLM31PG 110.675,72 r180 top (schematic designator L2)
R1_U_Amp1 "5k1" RESC2012X60N 50.585,43.347 r90 top (schematic designator R1)
R1_U_Amp2 "5k1" RESC2012X60N 50.585,51.347 r90 top (schematic designator R1)
R1_U_Amp3 "5k1" RESC2012X60N 50.585,59.347 r90 top (schematic designator R1)
R1_U_Amp4 "5k1" RESC2012X60N 50.585,67.347 r90 top (schematic designator R1)
R1_U_Amp5 "5k1" RESC2012X60N 50.585,75.347 r90 top (schematic designator R1)
R2_U_Amp1 "3" RESC2012X60N 65.25,44.5 r180 top (schematic designator R2)
R2_U_Amp2 "3" RESC2012X60N 65.25,52.5 r180 top (schematic designator R2)
R2_U_Amp3 "3" RESC2012X60N 65.25,60.5 r180 top (schematic designator R2)
R2_U_Amp4 "3" RESC2012X60N 65.25,68.5 r180 top (schematic designator R2)
R2_U_Amp5 "3" RESC2012X60N 65.25,76.5 r180 top (schematic designator R2)
R3_U_Amp1 "3" RESC2012X60N 65.25,41 r180 top (schematic designator R3)
R3_U_Amp2 "3" RESC2012X60N 65.25,49 r180 top (schematic designator R3)
R3_U_Amp3 "3" RESC2012X60N 65.25,57 r180 top (schematic designator R3)
R3_U_Amp4 "3" RESC2012X60N 65.25,65 r180 top (schematic designator R3)
R3_U_Amp5 "3" RESC2012X60N 65.25,73 r180 top (schematic designator R3)
R4_U_Amp1 "5k1" RESC2012X60N 69,41 r0 top (schematic designator R4)
R4_U_Amp2 "5k1" RESC2012X60N 69,49 r0 top (schematic designator R4)
R4_U_Amp3 "5k1" RESC2012X60N 69,57 r0 top (schematic designator R4)
R4_U_Amp4 "5k1" RESC2012X60N 69,65 r0 top (schematic designator R4)
R4_U_Amp5 "5k1" RESC2012X60N 69,73 r0 top (schematic designator R4)
R5_U_Amp1 "3" RESC2012X60N 84.5,44.5 r180 top (schematic designator R5)
R5_U_Amp2 "3" RESC2012X60N 84.5,52.5 r180 top (schematic designator R5)
R5_U_Amp3 "3" RESC2012X60N 84.5,60.5 r180 top (schematic designator R5)
R5_U_Amp4 "3" RESC2012X60N 84.5,68.5 r180 top (schematic designator R5)
R5_U_Amp5 "3" RESC2012X60N 84.5,76.5 r180 top (schematic designator R5)
R6_U_Amp1 "43k" RESC2012X60N 69,44.5 r180 top (schematic designator R6)
R6_U_Amp2 "43k" RESC2012X60N 69,52.5 r180 top (schematic designator R6)
R6_U_Amp3 "43k" RESC2012X60N 69,60.5 r180 top (schematic designator R6)
R6_U_Amp4 "43k" RESC2012X60N 69,68.5 r180 top (schematic designator R6)
R6_U_Amp5 "43k" RESC2012X60N 69,76.5 r180 top (schematic designator R6)
R7_U_Amp1 "3" RESC2012X60N 84.45,40.75 r180 top (schematic designator R7)
R7_U_Amp2 "3" RESC2012X60N 84.45,48.75 r180 top (schematic designator R7)
R7_U_Amp3 "3" RESC2012X60N 84.45,56.75 r180 top (schematic designator R7)
R7_U_Amp4 "3" RESC2012X60N 84.45,64.75 r180 top (schematic designator R7)
R7_U_Amp5 "3" RESC2012X60N 84.45,72.75 r180 top (schematic designator R7)
R8_U_Amp1 "3" RESC2012X60N 101.5,45.5 r180 top (schematic designator R8)
R8_U_Amp2 "3" RESC2012X60N 101.5,53.5 r180 top (schematic designator R8)
R8_U_Amp3 "3" RESC2012X60N 101.5,61.5 r180 top (schematic designator R8)
R8_U_Amp4 "3" RESC2012X60N 101.5,69.5 r180 top (schematic designator R8)
R8_U_Amp5 "3" RESC2012X60N 101.5,77.5 r180 top (schematic designator R8)
R9_U_Amp1 "3" RESC2012X60N 101.5,40 r180 top (schematic designator R9)
R9_U_Amp2 "3" RESC2012X60N 101.5,48 r180 top (schematic designator R9)
R9_U_Amp3 "3" RESC2012X60N 101.5,56 r180 top (schematic designator R9)
R9_U_Amp4 "3" RESC2012X60N 101.5,64 r180 top (schematic designator R9)
R9_U_Amp5 "3" RESC2012X60N 101.5,72 r180 top (schematic designator R9)
R10_U_Amp1 "51" RESC2012X60N 88.25,40 r180 top (schematic designator R10)
R10_U_Amp2 "51" RESC2012X60N 88.25,48 r180 top (schematic designator R10)
R10_U_Amp3 "51" RESC2012X60N 88.25,56 r180 top (schematic designator R10)
R10_U_Amp4 "51" RESC2012X60N 88.25,64 r180 top (schematic designator R10)
R10_U_Amp5 "51" RESC2012X60N 88.25,72 r180 top (schematic designator R10)
R11_U_Amp1 "51" RESC2012X60N 88.25,45.5 r180 top (schematic designator R11)
R11_U_Amp2 "51" RESC2012X60N 88.25,53.5 r180 top (schematic designator R11)
R11_U_Amp3 "51" RESC2012X60N 88.25,61.5 r180 top (schematic designator R11)
R11_U_Amp4 "51" RESC2012X60N 88.25,69.5 r180 top (schematic designator R11)
R11_U_Amp5 "51" RESC2012X60N 88.25,77.5 r180 top (schematic designator R11)
R12 "1k" RESC2012X60N 119.75,40.75 r270 top
R13_U_Amp1 "510" RESC2012X60N 39.585,43.347 r270 top (schematic designator R13)
R13_U_Amp2 "510" RESC2012X60N 39.585,51.347 r270 top (schematic designator R13)
R13_U_Amp3 "510" RESC2012X60N 39.585,59.347 r270 top (schematic designator R13)
R13_U_Amp4 "510" RESC2012X60N 39.585,67.347 r270 top (schematic designator R13)
R13_U_Amp5 "510" RESC2012X60N 39.585,75.347 r270 top (schematic designator R13)
T1_U_Amp1 "SST213" SOT143N 45.135,43.147 r90 top (schematic designator T1)
T1_U_Amp2 "SST213" SOT143N 45.135,51.147 r90 top (schematic designator T1)
T1_U_Amp3 "SST213" SOT143N 45.135,59.147 r90 top (schematic designator T1)
T1_U_Amp4 "SST213" SOT143N 45.135,67.147 r90 top (schematic designator T1)
T1_U_Amp5 "SST213" SOT143N 45.135,75.147 r90 top (schematic designator T1)

## Footprints (in the part's own frame and the unit in brackets; to place one, negate y for a bottom-side part, rotate by r counter-clockwise, add the part's x,y. Pads: shape width x height; smd on the part's side, far side on the other; paste and mask are expansions set on the pad)
CAPC2012X88N [mm] "Chip Capacitor, Body 2.0x1.25mm, IPC Medium Density"
  rect 1.15x1.45 smd: 1(-0.9,0) 2(0.9,0)
  silkscreen extent 0,-0.58 0,0.58, body extent -1.05,-0.67 1.05,0.68, height 0.9
CAPC2012X135N [mm] "Chip Capacitor, Body 2.0x1.25mm, IPC Medium Density"
  rect 1.05x1.4 smd: 1(-0.9,0) 2(0.9,0)
  silkscreen extent 0,-0.58 0,0.58, body extent -1.05,-0.67 1.05,0.68, height 1.25
IND_MURATA_BLM31PG [mm] "Chip Ferrite Bead, 3.20mm L X 1.60mm W, BLM31PG Series"
  rect 1.35x1.2 smd: 1(-1.675,0) 2(1.675,0)
  silkscreen extent -1.7,-0.9 1.7,0.9, body extent -1.6,-0.8 1.6,0.8, height 1.3
RESC2012X60N [mm] "Chip Resistor, EIA 0805, Metric 2012, Body 2.0x1.2mm, IPC Medium Density"
  rect 0.95x1.4 smd: 1(-1,0) 2(1,0)
  silkscreen extent 0,-0.55 0,0.55, body extent -1.1,-0.67 1.1,0.68, height 0.6
SOIC127P600X175-8N [mm] "SOIC 8, Pitch 1.27mm - Body 4x5mm, IPC Medium Density"
  rect 1.55x0.6 smd: 1(-2.7,1.905) 2(-2.7,0.635) 3(-2.7,-0.635) 4(-2.7,-1.905) 5(2.7,-1.905) 6(2.7,-0.635) 7(2.7,0.635) 8(2.7,1.905)
  silkscreen extent -2.52,-2.5 1.55,2.88, body extent -3.1,-2.5 3.1,2.5, height 1.75
SOIC127P600X175-9N-S229 [mm] "SOIC 8, Pitch 1.27mm - Body 4x5mm, (w/thermal tab 2.29mm X 2.29mm), IPC Medium Density"
  rect 1.55x0.6 smd: 1(-2.7,1.905) 2(-2.7,0.635) 3(-2.7,-0.635) 4(-2.7,-1.905) 5(2.7,-1.905) 6(2.7,-0.635) 7(2.7,0.635) 8(2.7,1.905)
  rect 2.29x2.29 smd: 9(0,0)
  silkscreen extent -3.32,-2.45 1.55,2.87, body extent -3.1,-2.5 3.1,2.5, height 1.75
SOT95P255X145-3N [mm] "SOT, 0.95mm Pitch; 3 Pin, 1.50mm W X 2.90mm L X 1.45mm H Body, IPC Medium Density"
  rect 1.15x0.6 smd: 1(-1.3,0.95) 2(-1.3,-0.95) 3(1.3,0)
  silkscreen extent -1.72,-1.45 0.4,1.87, body extent -1.35,-1.45 1.35,1.45, height 1.45
SOT95P280X145-5N [mm] "SOT, 0.95mm pitch; 5 pin, 1.60mm W X 2.90mm L X 1.45mm H body, IPC Medium Density"
  rect 1.1x0.6 smd: 1(-1.3,0.95) 2(-1.3,0) 3(-1.3,-0.95) 4(1.3,-0.95) 5(1.3,0.95)
  silkscreen extent -1.73,-1.45 0.43,1.87, body extent -1.4,-1.5 1.4,1.5, height 1.45
SOT143N [mm] "SOT143, 4-Leads, Body 3.0x2.6mm (max), Pitch 1.92mm, IPC Medium Density"
  rect 1.3x1 smd: 1(-1.2,0.75)
  rect 1.3x0.6 smd: 2(-1.2,-0.95) 3(1.2,-0.95) 4(1.2,0.95)
  silkscreen extent -1.17,-1.5 0.7,1.93, body extent -1.25,-1.5 1.25,1.5, height 1.1
TYCO_2007435-1 [mm] "0.578mm Pitch, Through-Hole Right Angle 19 Contacts Flag-HDMI Type-A Receptacle Thru Hole Mounting Pads"
  rrect50% 0.75x0.75 hole 0.55: 1(0.5,-5.202) 2(-0.5,-4.624) 3(0.5,-4.046) 4(-0.5,-3.468) 5(0.5,-2.89) 6(-0.5,-2.312) 7(0.5,-1.734) 8(-0.5,-1.156) 9(0.5,-0.578) 10(-0.5,0) 11(0.5,0.578) 12(-0.5,1.156) 13(0.5,1.734) 14(-0.5,2.312) 15(0.5,2.89) 16(-0.5,3.468) 17(0.5,4.046) 18(-0.5,4.624) 19(0.5,5.202)
  round 0.5 hole 1.7 unplated mask+0.6: H1(-2,6.148) H2(1.5,-7.102)
  oval 1.6x3.4 hole 0.9 slot 2.7 at 90 deg: SHIELD(-3.25,3.048) SHIELD(-3.25,-5.952) SHIELD(3.25,6.148) SHIELD(3.25,-3.352)
  silkscreen extent -3.87,-15.6 3.45,7.5, body extent -3.94,-15.6 3.94,7.5, height 16.43